# Altium PCB Isolated Gate Driver Bias Supply PCB.PcbDoc
Units mm, origin at the board's own origin, x right, y up, seen from the top; angles counter-clockwise.
Board outline 56.7 x 29.2 mm, 2 copper layers (Top Layer, Bottom Layer); 28 components, 23 nets, 89 pads, 0 vias.
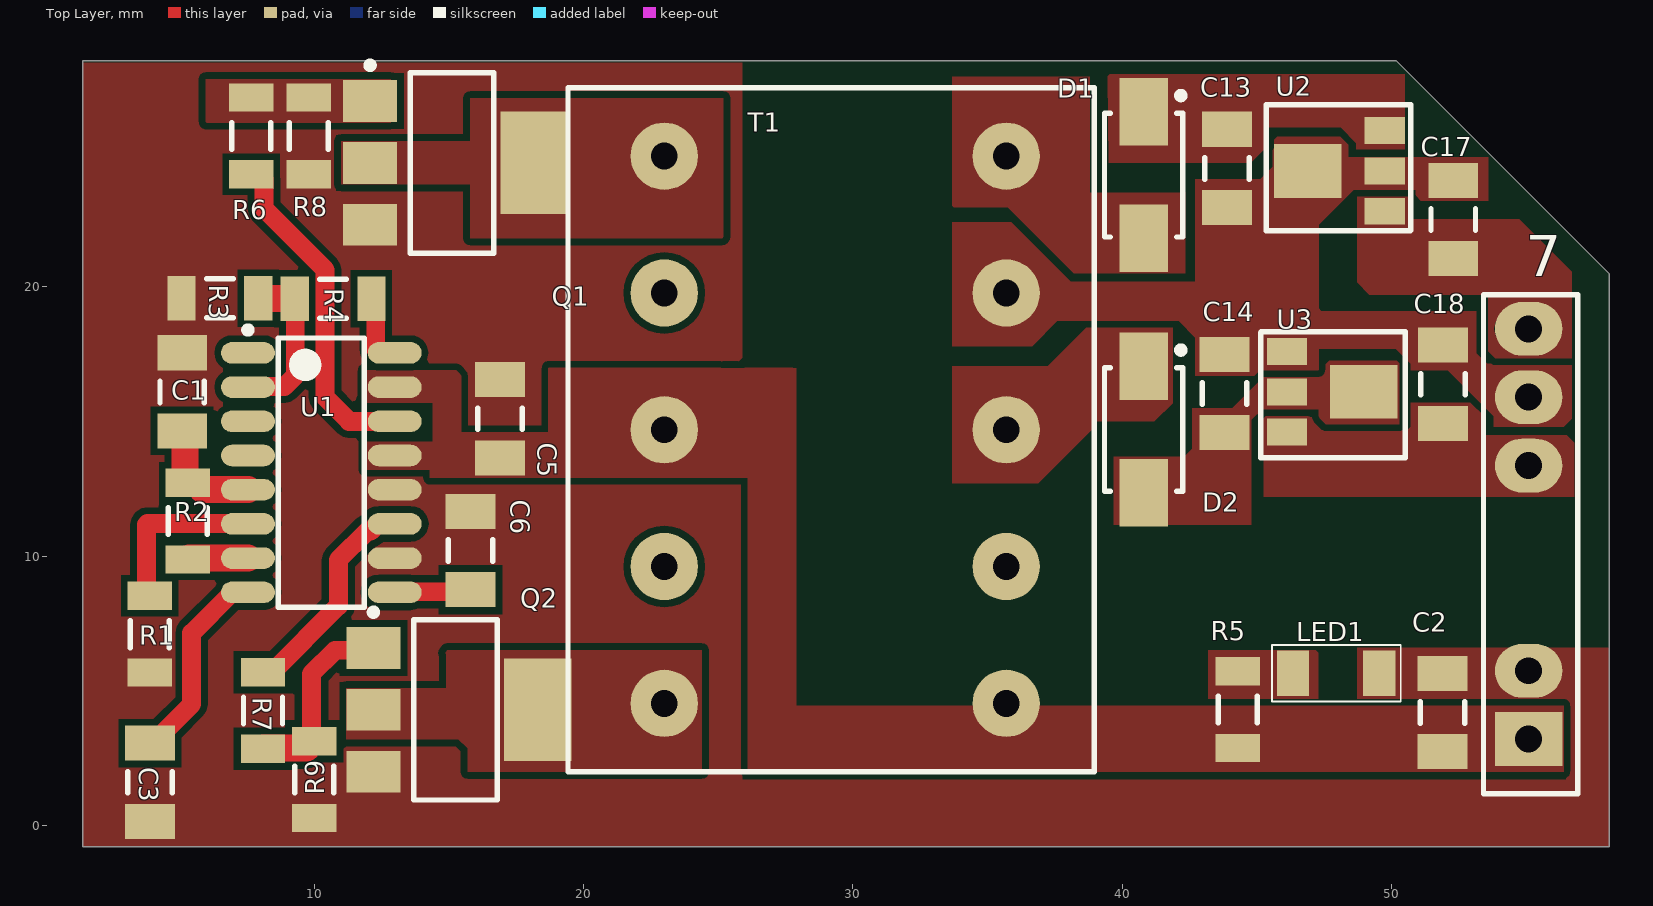
[diagram p0: Top Layer view]
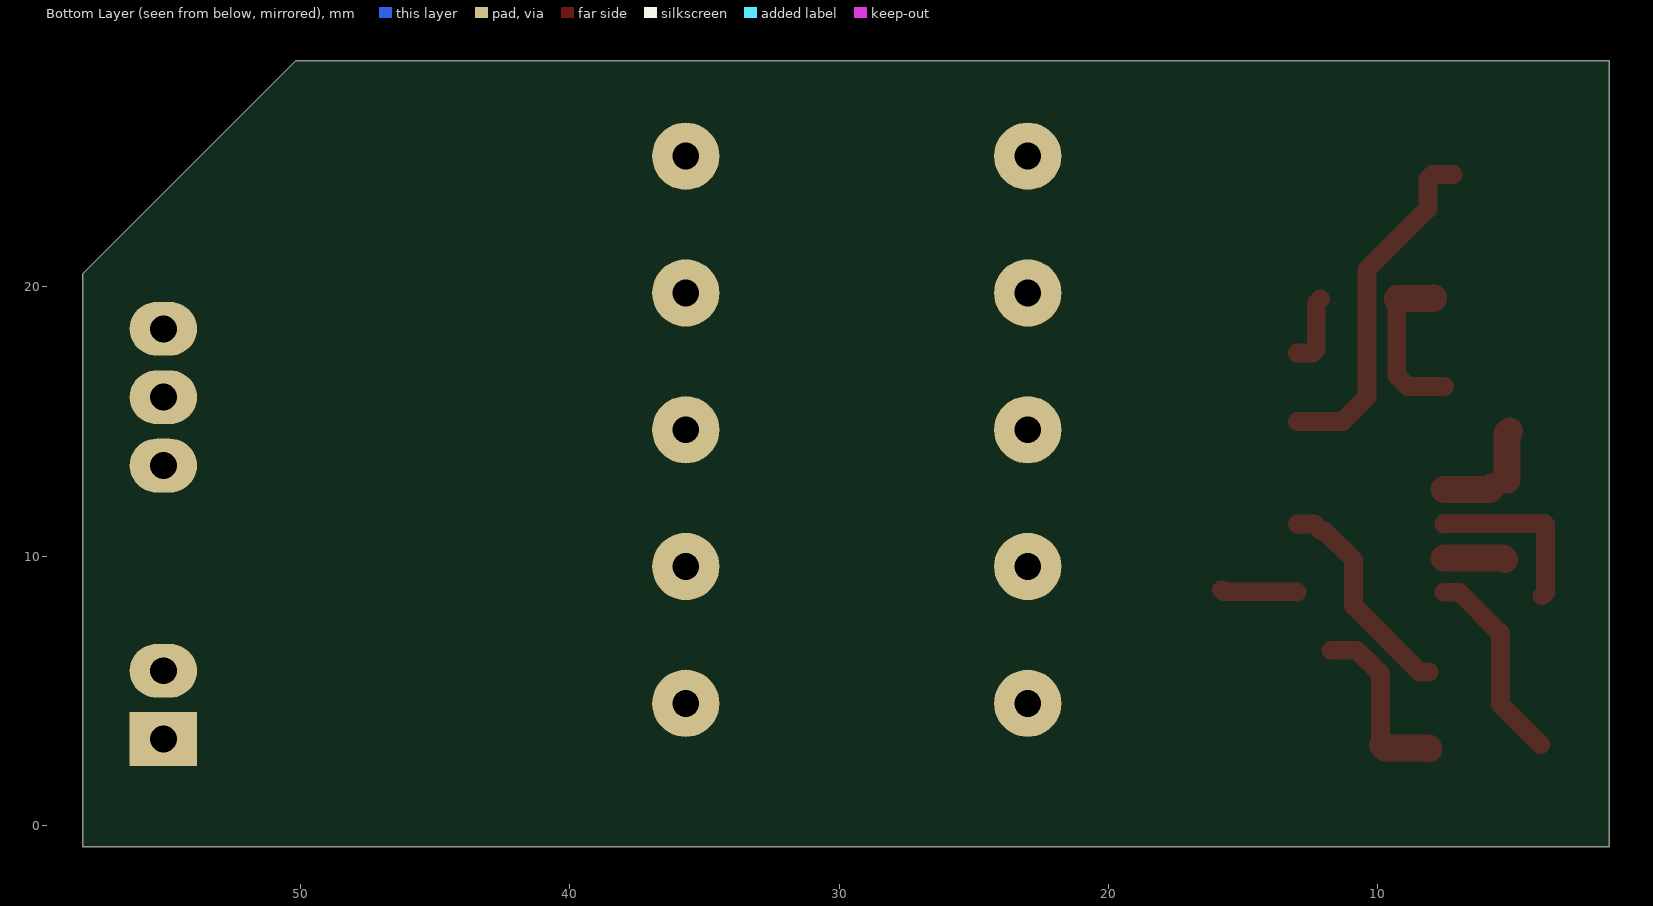
[diagram p1: Bottom Layer view, seen from below]
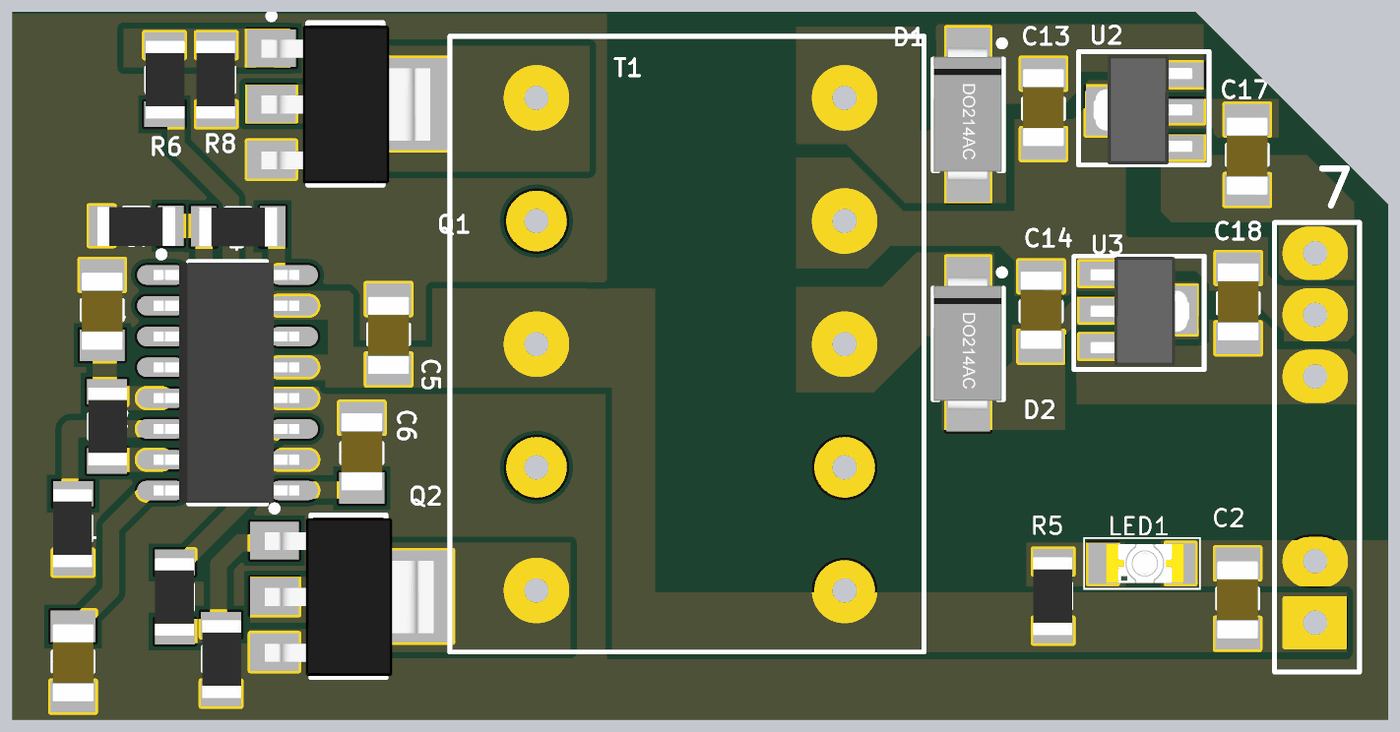
[diagram p2: 3D render of the assembled board from above, using the file's embedded part models]

## Layer stack, top to bottom
Top Solder: solder mask 0.0102, Solder Resist, Dk 3.5
Top Layer: signal copper 0.0356
Dielectric 1: dielectric 0.32, FR-4, Dk 4.8
Bottom Layer: signal copper 0.0356
Bottom Solder: solder mask 0.0102, Solder Resist, Dk 3.5

## Board outline
1.4,-0.8 1.4,28.4 50.171,28.4 58.1,20.47 58.1,-0.8

## Design rules (kind name [scope] priority, off if disabled: settings)
Clearance [All] p1: gap=0.254 ignorepadtopadclearanceinfootprint=FALSE except(0: Arc-Hole Track-Hole SMDPad-Hole THPad-Hole Via-Hole Fill-Hole Poly-Hole Region-Hole Text-Hole)
PlaneConnect [All] p1: planeconnectstyle=Direct reliefexpansion=0.508 reliefentries=4 reliefconductorwidth=0.254 reliefairgap=0.254
PolygonConnect [All] p1: connectstyle=Direct reliefconductorwidth=0.254 reliefentries=4 polygonreliefangle="90 Angle" airgapwidth=0.254
RoutingVias [All] p1: holewidth=0.711 width=1.27 viastyle="Through Hole" minholewidth=0.711 minwidth=1.27 maxholewidth=0.711 maxwidth=1.27
SolderMaskExpansion [All] p1: expansion=0.102 istentingtop=FALSE
Width [All] p1: maxlimit=1 minlimit=0.7 preferedwidth=0.7 minimp=50.000000 maximp=50.000000 favimp=50.000000
29 further rules are at their usual default settings.

## Components (designator, comment, footprint, x,y, rotation, side; value= is the part's Value field where it differs from the comment)
7 "7" SIP7 55.1,3.2 r180 top
C1 "5.6nF" Cap1206 5.1,16.1 r90 top
C2 "CL31A106KBHNNNE" Cap1206 51.9,4.195 r90 top
C3 "4.7unF" Cap1206 3.9,1.6 r90 top
C5 "CL31A106KBHNNNE" Cap1206 16.9,15.1 r90 top
C6 "10nF" Cap1206 15.8,10.2 r270 top
C13 "CL31A106KBHNNNE" Cap1206 43.9,24.4 r270 top
C14 "CL31A106KBHNNNE" Cap1206 43.8,16.04 r270 top
C17 "CL31A106KBHNNNE" Cap1206 52.3,22.5 r90 top
C18 "CL31A106KBHNNNE" Cap1206 51.925,16.381 r270 top
D1 "SS1200-LTP" DO-214AC 40.8,24.15 r270 top
D2 "SS1200-LTP" DO-214AC 40.8,14.7 r270 top
LED1 "LTST-C150KGKT" L-1206 47.95,5.645 r180 top
Q1 "IRFL110TRPBF" SOT223 15.125,24.6 r0 top
Q2 "IRFL110TRPBF" SOT223 15.25,4.29 r0 top
R1 "2.2k" RES1206 3.9,7.1 r90 top
R2 "10" RES1206 5.3,11.3 r270 top
R3 "10K" RES1206 6.5,19.575 r180 top
R4 "10K" RES1206 10.7,19.55 r180 top
R5 "10K" RES1206 44.3,4.3 r90 top
R6 "10" RES1206 7.665,25.6 r270 top
R7 "10" RES1206 8.1,4.265 r90 top
R8 "10K" RES1206 9.8,25.6 r90 top
R9 "10K" RES1206 10,1.7 r270 top
T1 "EE2006Transformer" EE2006 23,24.85 r0 top
U1 "SG3525AP013TR" "SOIC16N SG3525" 10.265,13.1 r0 top
U2 "L78M15CDT" sot89 49.575,22.805 r180 top
U3 "MC79M05CDTRKG" sot89 46.3,17.6 r0 top

## Footprints (in the part's own frame and the unit in brackets; to place one, negate y for a bottom-side part, rotate by r counter-clockwise, add the part's x,y. Pads: shape width x height; smd on the part's side, far side on the other; paste and mask are expansions set on the pad)
Cap1206 [mm]
  rect 1.3x1.85 smd: 1(-1.45,0) 2(1.45,0)
  silkscreen extent -0.4,-0.83 0.4,0.82, body extent -1.65,-0.85 1.55,0.85, height 1.75
DO-214AC [mm]
  rect 2.5x1.8 smd: a(2.35,0) k(-2.35,0)
  silkscreen extent -3.07,-1.45 2.3,1.51, body extent -2.77,-1.42 2.72,1.37, height 2.3
EE2006 [mm]
  round 2.5 hole 1: 1(0,0) 2(0,-5.08) 3(0,-10.16) 4(0,-15.24) 5(0,-20.32) 6(12.7,-20.32) 7(12.7,-15.24) 8(12.7,-10.16) 9(12.7,-5.08) 10(12.7,0)
  silkscreen extent -3.57,-22.86 15.98,2.54
L-1206 [mm]
  rect 1.2x1.7 smd: 1(-1.6,0) 2(1.6,0)
  silkscreen extent -2.4,-1.05 2.37,1.05, body extent -1.73,-0.8 1.48,0.8, height 1.11
RES1206 [mm] "Chip Resistor, 2-Leads, Body 3,15x1,58mm, IPC Medium Density"
  rect 1.05x1.65 smd: 1(-1.425,0) 2(1.425,0)
  silkscreen extent -0.5,-0.73 0.5,0.72, body extent -1.6,-0.78 1.6,0.83, height 0.61
SIP7 [mm]
  rect 2.5x2 hole 1: 1(0,0)
  oval 2.5x2 hole 1: 2(0,-2.54) 5(0,-10.16) 6(0,-12.7) 7(0,-15.24)
  silkscreen extent -1.82,-16.51 1.68,2.03
"SOIC16N SG3525" [mm] "SOIC, 16-Leads, Body 9,90x3,90mm, Pitch 1,27mm, IPC Medium Density"
  oval 2x0.8 smd: 1(-2.725,4.445) 2(-2.725,3.175) 3(-2.725,1.905) 4(-2.725,0.635) 5(-2.725,-0.635) 6(-2.725,-1.905) 7(-2.725,-3.175) 8(-2.725,-4.445) 9(2.725,-4.445) 10(2.725,-3.175) 11(2.725,-1.905) 12(2.725,-0.635) 13(2.725,0.635) 14(2.725,1.905) 15(2.725,3.175) 16(2.725,4.445)
  silkscreen extent -2.85,-5 1.6,5.42, body extent -3.05,-4.95 2.95,4.95, height 1.26
sot89 [mm]
  rect 1.5x1 smd: 1(-0.175,0) 2(-0.175,-1.5) 3(-0.175,-3)
  rect 2.5x2 smd: 2(2.675,-1.5)
  silkscreen extent -1.15,-3.95 4.23,0.72, body extent -0.47,-3.8 3.62,0.7, height 1.51
SOT223 [mm] "SOT223, 4-Leads, Body 6.50x7.00mm (avg), Pitch 2.30mm, IPC Medium Density"
  rect 2x1.55 smd: 1(-3.05,2.3) 2(-3.05,0) 3(-3.05,-2.3)
  rect 2.5x3.8 smd: 4(3.05,0)
  silkscreen extent -3.17,-3.35 1.55,3.75, body extent -3.45,-6.7 3.51,3.23, height 1.61

## Part data
7: library part sip7
C1 C3 C6: library part CL31A106KBHNNNE, "Cap Ceramic 10uF 50V X5R 10% SMD 1206 85C T/R", Capacitance=10uF, Case/Package=1206, Case Code (Metric)=3216, Dielectric=X5R, Manufacturer=Samsung, Max Operating Temperature=85°C, Min Operating Temperature=-55°C, Package Quantity=1, Supplier Part Number 1=1276-2876-2-ND, Tolerance=10%, Voltage Rating=50V, Case Code (Imperial)=1206, ComponentLink1Description=https://media.digikey.com/pdf/Data%20Sheets/Samsung%20PDFs/CL_Series_MLCC_ds.pdf?src-supplier=Digi-Key, ComponentLink1URL=https://media.digikey.com/pdf/Data%20Sheets/Samsung%20PDFs/CL_Series_MLCC_ds.pdf?src-supplier=Digi-Key, ComponentLink2Description=http://www1.futureelectronics.com/doc/SAMSUNG%20PASSIVE/CL05B104KQ5NNNC.pdf?src-supplier=Future+Electronics, ComponentLink2URL=http://www1.futureelectronics.com/doc/SAMSUNG%20PASSIVE/CL05B104KQ5NNNC.pdf?src-supplier=Future+Electronics, ComponentLink3Description=http://www.rapidonline.com/pdf/71-0881.pdf?src-supplier=Rapid+Electronics, ComponentLink3URL=http://www.rapidonline.com/pdf/71-0881.pdf?src-supplier=Rapid+Electronics, ComponentLink4Description=https://www.verical.com/server-webapp/html/getDatasheet?partID=353196&src-supplier=Verical, ComponentLink4URL=https://www.verical.com/server-webapp/html/getDatasheet?partID=353196&src-supplier=Verical, ComponentLink5Description=https://produktinfo.conrad.com/datenblaetter/450000-474999/452492-da-01-en-VS_KONDENSATOR_1206.pdf?src-supplier=Conrad, ComponentLink5URL=https://produktinfo.conrad.com/datenblaetter/450000-474999/452492-da-01-en-VS_KONDENSATOR_1206.pdf?src-supplier=Conrad, Contact Plating=Tin, Depth=1.6mm, Height=1.6mm, Lead Free="Lead Free", Length=3.2mm, Manufacturer Part Number=CL31A106KBHNNNE, Material=Ceramic, Mount="Surface Mount", Packaging="Tape and Reel", Pricing 1="2000 = 0,17875, 4000 = 0,16758 (USD)", Radiation Hardening=No, RoHS=Yes, Stock 1=482000, Supplier 1=Digi-Key, Thickness=0.071inch, Voltage Rating (DC)=50V, Width=0.063inch
C2 C5 C13 C14 C17 C18: "Cap Ceramic 10uF 50V X5R 10% SMD 1206 85C T/R", Capacitance=10uF, Case/Package=1206, Case Code (Metric)=3216, Dielectric=X5R, Manufacturer=Samsung, Max Operating Temperature=85°C, Min Operating Temperature=-55°C, Package Quantity=1, Supplier Part Number 1=1276-2876-2-ND, Tolerance=10%, Voltage Rating=50V, Case Code (Imperial)=1206, ComponentLink1Description=https://media.digikey.com/pdf/Data%20Sheets/Samsung%20PDFs/CL_Series_MLCC_ds.pdf?src-supplier=Digi-Key, ComponentLink1URL=https://media.digikey.com/pdf/Data%20Sheets/Samsung%20PDFs/CL_Series_MLCC_ds.pdf?src-supplier=Digi-Key, ComponentLink2Description=http://www1.futureelectronics.com/doc/SAMSUNG%20PASSIVE/CL05B104KQ5NNNC.pdf?src-supplier=Future+Electronics, ComponentLink2URL=http://www1.futureelectronics.com/doc/SAMSUNG%20PASSIVE/CL05B104KQ5NNNC.pdf?src-supplier=Future+Electronics, ComponentLink3Description=http://www.rapidonline.com/pdf/71-0881.pdf?src-supplier=Rapid+Electronics, ComponentLink3URL=http://www.rapidonline.com/pdf/71-0881.pdf?src-supplier=Rapid+Electronics, ComponentLink4Description=https://www.verical.com/server-webapp/html/getDatasheet?partID=353196&src-supplier=Verical, ComponentLink4URL=https://www.verical.com/server-webapp/html/getDatasheet?partID=353196&src-supplier=Verical, ComponentLink5Description=https://produktinfo.conrad.com/datenblaetter/450000-474999/452492-da-01-en-VS_KONDENSATOR_1206.pdf?src-supplier=Conrad, ComponentLink5URL=https://produktinfo.conrad.com/datenblaetter/450000-474999/452492-da-01-en-VS_KONDENSATOR_1206.pdf?src-supplier=Conrad, Contact Plating=Tin, Depth=1.6mm, Height=1.6mm, Lead Free="Lead Free", Length=3.2mm, Manufacturer Part Number=CL31A106KBHNNNE, Material=Ceramic, Mount="Surface Mount", Packaging="Tape and Reel", Pricing 1="2000 = 0,17875, 4000 = 0,16758 (USD)", Radiation Hardening=No, RoHS=Yes, Stock 1=482000, Supplier 1=Digi-Key, Thickness=0.071inch, Voltage Rating (DC)=50V, Width=0.063inch
D1 D2: "DIODE SCHOTTKY 200V 1A DO214AC", Average Rectified Current=1A, Forward Voltage=920mV, Manufacturer=MCC, Max Forward Surge Current (Ifsm)=30A, Max Operating Temperature=150°C, Max Repetitive Reverse Voltage (Vrrm)=200V, Max Reverse Leakage Current=1mA, Min Operating Temperature=-55°C, Package Quantity=1, Supplier Part Number 1=SS1200-LTPMSTR-ND, ComponentLink1Description=https://datasheet.ciiva.com/913/ss1150-l-ss1200-ldo-214ac-913194.pdf?src-supplier=Digi-Key, ComponentLink1URL=https://datasheet.ciiva.com/913/ss1150-l-ss1200-ldo-214ac-913194.pdf?src-supplier=Digi-Key, ComponentLink2Description=https://datasheet.ciiva.com/15404/ss1150-l-ss1200-ldo-214ac-272760-15404740.pdf?src-supplier=Mouser, ComponentLink2URL=https://datasheet.ciiva.com/15404/ss1150-l-ss1200-ldo-214ac-272760-15404740.pdf?src-supplier=Mouser, ComponentLink3Description=https://datasheet.ciiva.com/913/ss1150-l-ss1200-ldo-214ac-913195.pdf?src-supplier=Digi-Key, ComponentLink3URL=https://datasheet.ciiva.com/913/ss1150-l-ss1200-ldo-214ac-913195.pdf?src-supplier=Digi-Key, ComponentLink4Description=https://datasheet.ciiva.com/913/ss1150-l-ss1200-ldo-214ac-913196.pdf?src-supplier=Digi-Key, ComponentLink4URL=https://datasheet.ciiva.com/913/ss1150-l-ss1200-ldo-214ac-913196.pdf?src-supplier=Digi-Key, ComponentLink5Description=https://datasheet.ciiva.com/17447/ss1150-l-ss1200-ldo-214ac-17447695.pdf?src-supplier=Future+Electronics, ComponentLink5URL=https://datasheet.ciiva.com/17447/ss1150-l-ss1200-ldo-214ac-17447695.pdf?src-supplier=Future+Electronics, Element Configuration=Single, Forward Current=1A, Lead Free="Lead Free", Manufacturer Part Number=SS1200-LTP, Max Reverse Voltage (DC)=200V, Max Surge Current=30A, Mount="Surface Mount", Packaging="Tape and Reel", Peak Reverse Current=1mA, Pricing 1="5000 = 0,09300, 10000 = 0,08700, 25000 = 0,08400 (USD)", RoHS=Yes, Stock 1=10000, Supplier 1=Digi-Key
LED1: "LED", Manufacturer_Name=Lite-On, Mouser Part Number=859-LTST-C150KGKT, RS Part Number=6920871, Datasheet Link=http://optoelectronics.liteon.com/upload/download/ds22-2000-072/ltst-c150kgkt.pdf, Height=1.2mm, Manufacturer_Part_Number=LTST-C150KGKT, Mouser Price/Stock=https://www.mouser.com/Search/Refine.aspx?Keyword=859-LTST-C150KGKT, RS Price/Stock=https://uk.rs-online.com/web/p/products/6920871
Q1 Q2: "Trans MOSFET N-CH 100V 1.5A 4-Pin(3+Tab) T/R", Case/Package=SOT-223, Continuous Drain Current (ID)=1.5A, Current=15A, Drain to Source Breakdown Voltage=100V, Drain to Source Resistance=540mR, Gate to Source Voltage (Vgs)=20V, Input Capacitance=180pF, Manufacturer=Vishay, Max Operating Temperature=150°C, Max Power Dissipation=2W, Min Operating Temperature=-55°C, Package Quantity=1, Supplier Part Number 1=IRFL110PBFTR-ND, ComponentLink1Description=http://www.vishay.com/docs/91192/sihfl110.pdf?src-supplier=Avnet, ComponentLink1URL=http://www.vishay.com/docs/91192/sihfl110.pdf?src-supplier=Avnet, ComponentLink2Description=http://www.vishay.com/docs/91192/sihfl110.pdf?src-supplier=Future+Electronics, ComponentLink2URL=http://www.vishay.com/docs/91192/sihfl110.pdf?src-supplier=Future+Electronics, ComponentLink3Description=http://www.vishay.com/docs/91192/sihfl110.pdf?src-supplier=Avnet+Europe, ComponentLink3URL=http://www.vishay.com/docs/91192/sihfl110.pdf?src-supplier=Avnet+Europe, ComponentLink4Description=https://www.verical.com/server-webapp/html/getDatasheet?partID=80948&src-supplier=Verical, ComponentLink4URL=https://www.verical.com/server-webapp/html/getDatasheet?partID=80948&src-supplier=Verical, ComponentLink5Description=http://www.vishay.com/docs/91192/sihfl110.pdf?src-supplier=Digi-Key, ComponentLink5URL=http://www.vishay.com/docs/91192/sihfl110.pdf?src-supplier=Digi-Key, ComponentLink6Description=http://uk.rs-online.com/webdocs/126c/0900766b8126cec6.pdf?src-supplier=RSComponents, ComponentLink6URL=http://uk.rs-online.com/webdocs/126c/0900766b8126cec6.pdf?src-supplier=RSComponents, ComponentLink7Description=http://www.jameco.com/Jameco/Products/ProdDS/1562152.pdf?src-supplier=Jameco, ComponentLink7URL=http://www.jameco.com/Jameco/Products/ProdDS/1562152.pdf?src-supplier=Jameco, ComponentLink8Description=http://datasheet.iiic.cc/vishay_[siliconix]/IRFL110TRPBF.pdf?src-supplier=IIIC, ComponentLink8URL=http://datasheet.iiic.cc/vishay_[siliconix]/IRFL110TRPBF.pdf?src-supplier=IIIC, Contact Plating=Matte,Tin, Drain to Source Voltage (Vdss)=100V, Element Configuration=Single, Fall Time=9.4ns, Height=1.8mm, Lead Free="Lead Free", Length=6.7mm, Manufacturer Part Number=IRFL110TRPBF, Mount="Surface Mount", Number of Channels=1, Number of Elements=1, Number of Pins=3, On-State Resistance=540mR, Packaging="Tape and Reel", Power Dissipation=2W, Pricing 1="2500 = 0,29779 (USD)", Radiation Hardening=No, Rds On Max=540mR, REACH SVHC=Unknown, Rise Time=16ns, RoHS=Yes, Stock 1=5000, Supplier 1=Digi-Key, Turn-Off Delay Time=15ns, Turn-On Delay Time=6.9ns, Voltage=100V, Weight=0.008826oz, Width=3.7mm
R1 R2 R3 R4 R5 R6 R7 R8 R9: library part RMCF1206ZT0R00, "RES 0 OHM JUMPER 1/4W 1206", Case/Package=1206, Case Code (Metric)=3216, Current Rating=2A, Manufacturer="Stackpole Electronics", Max Operating Temperature=155°C, Max Power Dissipation=250mW, Min Operating Temperature=-55°C, Resistance=0mR, Supplier Part Number 1=RMCF1206ZT0R00TR-ND, Working Voltage=200V, Case Code (Imperial)=1206, Composition="Thick Film", Contact Plating=Matte,Tin, Depth=1.6mm, Features="Automotive AEC-Q200", Height=0.028inch, Lead Free="Lead Free", Length=0.126inch, Manufacturer Part Number=RMCF1206ZT0R00, Military Standard=Not, Mount="Surface Mount", Number of Terminations=2, Packaging="Tape and Reel", Power Rating=250mW, Pricing 1="5000 = 0,00355, 10000 = 0,00309, 25000 = 0,00271, 50000 = 0,00249, 125000 = 0,00244 (USD)", Radiation Hardening=No, RoHS=Yes, Stock 1=1700000, Supplier 1=Digi-Key, Width=0.063inch
U1: "IC REG CTRLR BCK/PSH-PULL 16SOIC", Case/Package=SOIC, Manufacturer=STMicroelectronics, Max Frequency=500kHz, Max Operating Temperature=70°C, Max Supply Current=20mA, Max Supply Voltage=35V, Min Operating Temperature=0°C, Operating Supply Current=14mA, Output Current=400A, Output Voltage=5.2V, Package Quantity=1, Supplier Part Number 1=497-6479-1-ND, Switching Frequency=400kHz, ComponentLink1Description=http://www.st.com/content/ccc/resource/technical/document/datasheet/c0/12/98/4a/3b/1a/4b/8b/CD00000958.pdf/files/CD00000958.pdf/jcr:content/translations/en.CD00000958.pdf?src-supplier=Digi-Key, ComponentLink1URL=http://www.st.com/content/ccc/resource/technical/document/datasheet/c0/12/98/4a/3b/1a/4b/8b/CD00000958.pdf/files/CD00000958.pdf/jcr:content/translations/en.CD00000958.pdf?src-supplier=Digi-Key, ComponentLink2Description=https://www.verical.com/server-webapp/html/getDatasheet?partID=376579&src-supplier=Verical, ComponentLink2URL=https://www.verical.com/server-webapp/html/getDatasheet?partID=376579&src-supplier=Verical, ComponentLink3Description=http://www.produktinfo.conrad.com/datenblaetter/1100000-1199999/001185611-da-01-en-IC_REG_CTRLR_P_SG3525AP013TR_SOIC_16_STM.pdf?src-supplier=Conrad, ComponentLink3URL=http://www.produktinfo.conrad.com/datenblaetter/1100000-1199999/001185611-da-01-en-IC_REG_CTRLR_P_SG3525AP013TR_SOIC_16_STM.pdf?src-supplier=Conrad, Duty Cycle=49%, Fall Time=50ns, Lead Free="Lead Free", Manufacturer Part Number=SG3525AP013TR, Max Duty Cycle=49%, Mount="Surface Mount", Number of Outputs=2, Number of Pins=16, Packaging="Tape and Reel", Pricing 1="1 = 1,58000, 10 = 1,41600, 100 = 1,10400, 500 = 0,91196, 1000 = 0,71997 (USD)", Radiation Hardening=No, Rise Time=100ns, RoHS=Yes, Stock 1=5712, Supplier 1=Digi-Key, Weight=0.007079oz
U2: "Linear Voltage Regulators 15V 0.5A Positive", Case/Package=DPAK, Dropout Voltage=2V, Manufacturer=STMicroelectronics, Max Input Voltage=35V, Max Operating Temperature=150°C, Max Output Current=500mA, Min Operating Temperature=0°C, Output Voltage=15V, Package Quantity=75, Quiescent Current=6mA, ComponentLink1Description=http://docs-usa.electrocomponents.com/techlib:/itc_doclist_US.htm?stockno=1890999&src-supplier=Allied+Electronics, ComponentLink1URL=http://docs-usa.electrocomponents.com/techlib:/itc_doclist_US.htm?stockno=1890999&src-supplier=Allied+Electronics, ComponentLink2Description=http://www.st.com/web/en/resource/technical/document/datasheet/CD00000447.pdf?src-supplier=Avnet+Europe, ComponentLink2URL=http://www.st.com/web/en/resource/technical/document/datasheet/CD00000447.pdf?src-supplier=Avnet+Europe, ComponentLink3Description=http://www.mouser.com/ds/2/389/stmicroelectronics_cd00000447-329548.pdf?src-supplier=Mouser, ComponentLink3URL=http://www.mouser.com/ds/2/389/stmicroelectronics_cd00000447-329548.pdf?src-supplier=Mouser, Height=2.4mm, Length=6.6mm, Manufacturer Part Number=L78M15CDT, Min Input Voltage=35V, Mount="Surface Mount", Number of Outputs=1, Number of Pins=3, Output Current=500mA, Output Type=Fixed, Packaging=Rail/Tube, Polarity=Positive, Radiation Hardening=No, RoHS=Yes, Supplier 1=Avnet, Supplier Part Number 1=L78M15CDT, Width=6.2mm
U3: "ON SEMICONDUCTOR - MC79M05CDTRKG - NEGATIVE VOLTAGE REGULATOR, -5V, DPAK-3", Case/Package=DPAK, Dropout Voltage=1.1V, Manufacturer="ON Semiconductor", Max Input Voltage=-35V, Max Operating Temperature=125°C, Max Output Current=500mA, Max Output Voltage=-5.2V, Min Input Voltage=-7V, Min Operating Temperature=0°C, Min Output Voltage=-5V, Output Voltage Accuracy=4%, Package Quantity=1, Power Supply Rejection Ratio (PSRR)=66dB, Supplier Part Number 1=MC79M05CDTRKGOSTR-ND, Accuracy=4%, ComponentLink1Description=http://www.farnell.com/datasheets/2236912.pdf?src-supplier=Newark, ComponentLink1URL=http://www.farnell.com/datasheets/2236912.pdf?src-supplier=Newark, ComponentLink2Description=http://www.onsemi.com/pub/Collateral/MC79M00-D.PDF?src-supplier=Digi-Key, ComponentLink2URL=http://www.onsemi.com/pub/Collateral/MC79M00-D.PDF?src-supplier=Digi-Key, ComponentLink3Description=http://www.farnell.com/datasheets/1747960.pdf?src-supplier=Element14, ComponentLink3URL=http://www.farnell.com/datasheets/1747960.pdf?src-supplier=Element14, ComponentLink4Description=http://www.onsemi.com/pub/Collateral/MC79M00-D.PDF?src-supplier=Avnet+Europe, ComponentLink4URL=http://www.onsemi.com/pub/Collateral/MC79M00-D.PDF?src-supplier=Avnet+Europe, Contact Plating=Matte,Tin, Halogen Free="Halogen Free", Height=2.38mm, Lead Free="Lead Free", Length=6.73mm, Manufacturer Part Number=MC79M05CDTRKG, Mount="Surface Mount", Nominal Output Voltage=-5V, Number of Outputs=1, Number of Pins=3, Number of Regulators=1, Output Current=500mA, Output Type=Fixed, Output Voltage=-5V, Packaging="Tape and Reel", Polarity=Negative, Pricing 1="2500 = 0,18538, 5000 = 0,17342, 12500 = 0,16146, 25000 = 0,15309, 62500 = 0,14950 (USD)", Radiation Hardening=No, REACH SVHC="No SVHC", RoHS=Yes, Stock 1=5000, Supplier 1=Digi-Key, Width=6.22mm

## Nets (pads, with @x,y where several pads share a name; then routed paths per layer and width w, separated by ;. In a path a pad name is that pad's centre, name@x,y a point inside that pad or via, vN(x,y) a via of type N, cw(c..) or ccw(c..) an arc to the next point about the centre after c; other vN are vias at no path point)
12v: 7.1 C2.1 C5.1 R5.1 T1.3 T1.6 U1.13 U1.15 | length 0.3
  Top Layer w1: T1.3@23,14.396 T1.3
+15v_1: 7.7 C17.1 U2.1 | length 0.7
  Top Layer w0.7: 7.7@54.448,18.44 7.7
-5v_1: 7.5 C18.2 U3.3
GND: 7.2 C1.2 C2.2 C3.1 C5.2 C6.1 LED1.1 Q1.3 Q2.3 R1.1 R3.2 R8.1 R9.2 U1.10 U1.12
Gnd1: 7.6 C13.2 C14.1 C17.2 C18.1 T1.9 U2.2 U3.1
NetC1_1: C1.1 R2.1 U1.5 | length 3.7
  Top Layer w1: C1.1 5.2,14.55 R2.1@5.2,12.825 ; R2.1@5.76,12.565 5.86,12.465 U1.5
NetC3_2: C3.2 U1.8 | length 7.5
  Top Layer w0.7: C3.2@3.95,3 5.45,4.5 5.45,7.138 6.967,8.655 U1.8
NetC6_2: C6.2 U1.9 | length 2.8
  Top Layer w0.7: U1.9 13.009,8.674 15.724,8.674 C6.2
NetC13_1: C13.1 D1.k U2.3
NetC14_2: C14.2 D2.a U3.2
NetD1_a: D1.a T1.10
NetD2_k: D2.k T1.8
NetLED1_2: LED1.2 R5.2
NetQ1_1: Q1.1 R6.1 R8.2
NetQ1_2: Q1.2 Q1.4 T1.1 | length 0.4
  Top Layer w0.7: T1.1@22.75,24.6 T1.1
NetQ2_1: Q2.1 R7.1 R9.1 | length 6.7
  Top Layer w0.7: R9.1@9.827,2.982 9.9,3.055 9.9,5.624 10.776,6.5 Q2.1@11.75,6.5
  Top Layer w1: R7.1 8.125,2.865 9.71,2.865 R9.1@9.827,2.982
NetQ2_2: Q2.2 Q2.4 T1.5 | length 0.5
  Top Layer w0.7: T1.5@22.67,4.2 T1.5
NetR1_2: R1.2 U1.6 | length 6.5
  Top Layer w0.7: R1.2 3.771,8.654 3.771,11.165 3.81,11.204 7.531,11.204 U1.6
NetR2_2: R2.2 U1.7 | length 2.3
  Top Layer w1: R2.2 5.35,9.925 U1.7
NetR3_1: R3.1 R4.2 U1.2 | length 6.2
  Top Layer w0.7: U1.2@7.521,16.294 U1.2 7.559,16.294 8.89,16.294 9.3,16.704 9.3,19.525 R4.2
  Top Layer w1: R3.1 7.938,19.563 9.262,19.563 R4.2
NetR4_1: R4.1 U1.16 | length 2.7
  Top Layer w0.7: R4.1 12.287,19.389 12.287,17.675 12.417,17.545 U1.16
NetR6_2: R6.2 U1.14 | length 13.2
  Top Layer w0.7: R6.2@7.2,24.175 R6.2@7.509,24.175 ; R6.2@7.4,24.175 R6.2@7.7,24.175 ; R6.2 7.7,24.175 7.965,24.175 8.14,24 8.14,22.889 10.404,20.626 10.404,15.896 11.3,15 12.985,15 U1.14
NetR7_2: R7.2 U1.11 | length 8.2
  Top Layer w0.7: R7.2 8.44,5.69 10.9,8.15 10.9,9.855 11.974,10.929 12.097,10.929 12.363,11.195 U1.11 U1.11@12.971,11.176
pads on no net: T1.2 T1.4 T1.7 U1.1 U1.3 U1.4

## Polygon pours and split planes (outlines as drawn)
NetLED1_2 on Top Layer "Top Layer-NetLED1_2" (solid, remove dead copper, pour order 54): 43.2,6.498 47.287,6.502 47.287,4.635 47.222,4.635 43.2,4.635
12v on Top Layer "Top Layer-12v" (solid, remove dead copper, pour order 50): 26.1,12.9 20.5,12.9 20.5,16.98 27.9,16.98 27.9,4.45 56.4,4.45 56.4,1.99 26.1,1.99
NetQ1_1 on Top Layer "Top Layer-NetQ1_1" (solid, remove dead copper, pour order 46): 5.98,27.7 12.85,27.7 12.85,26.1 5.98,26.1
NetQ2_2 on Top Layer "Top Layer-NetQ2_2" (solid, remove dead copper, pour order 44): 11.2,5.1 14.9,5.1 14.9,6.368 14.85,6.418 14.932,6.5 24.4,6.5 24.4,1.99 15.7,1.99 15.7,2.856 15.356,3.2 11.2,3.2
12v on Top Layer "Top Layer-12v 1" (solid, remove dead copper, pour order 42): 14.4,14.59 14.4,15.7 11.895,15.7 11.8,15.795 11.865,15.86 11.865,16.9 15.275,16.9 15.456,16.719 15.456,14.59 18.7,14.59 18.7,17 27.88,17 27.9,16.98 27.9,12.9 14.3,12.9 14.3,13.2 11.9,13.2 11.9,14.25 14.4,14.25
NetQ1_2 on Top Layer "Top Layer-NetQ1_2" (solid, remove dead copper, pour order 40): 11,25.4 15.8,25.4 15.8,27 25.2,27 25.2,21.85 25.15,21.8 15.8,21.8 15.8,23.8 11,23.8
-5v_1 on Top Layer "Top Layer--5v_1" (solid, remove dead copper, pour order 38): 45.241,15.255 47,15.255 47.574,14.681 50.61,14.681 50.725,14.796 50.725,15.7 52.944,15.7 53.425,15.219 53.425,14.49 56.51,14.49 56.8,14.2 56.8,12.2 45.257,12.2
NetC14_2 on Top Layer "Top Layer-NetC14_2" (solid, remove dead copper, pour order 36): 39.7,13.69 42.31,13.69 42.6,13.98 42.6,15.484 44.084,15.484 45.337,16.736 47.5,16.736 47.5,17.055 47.7,17.255 50.2,17.255 50.3,17.155 50.3,14.886 47.569,14.886 47.3,15.155 47.3,15.455 45.2,15.455 44.8,15.055 44.8,11.155 39.7,11.155
+15v_1 on Top Layer "Top Layer-+15v_1" (solid, remove dead copper, pour order 34): 48.734,23.5 50.7,23.5 50.725,23.475 50.725,22.5 54.759,22.5 56.7,20.559 56.7,17.35 53.858,17.35 53.6,17.608 53.6,19.71 49.19,19.71 48.734,20.166
NetD2_k on Top Layer "Top Layer-NetD2_k" (solid, remove dead copper, pour order 32): 33.7,17.05 37.242,17.05 38.692,18.5 41.875,18.5 41.875,15.675 41.205,15.005 38.9,15.005 38.9,14.704 36.896,12.7 33.7,12.7
Gnd1 on Top Layer "Top Layer-Gnd1" (solid, remove dead copper, pour order 30): 47.3,19.2 47.4,19.1 53.161,19.1 53.161,17.539 53.557,17.143 56.7,17.143 56.7,15.1 56.4,14.8 53.8,14.8 53.8,15.2 52.1,16.9 50.725,16.9 50.725,17.143 50.168,17.7 47.3,17.7 47.3,16.9 45.119,16.9 44.919,16.7 42.715,16.7 42.715,18.116 42.098,18.733 37.6,18.733 36.669,17.8 33.7,17.8 33.7,22.4 35.884,22.4 38.1,20.184 42.715,20.184 42.715,23.984 45.134,23.984 45.6,24.45 45.6,25.572 48.128,25.572 48.4,25.3 48.4,24.812 53.6,24.812 53.6,23.2 51.1,23.2 50.9,23.4 50.9,23.6 48.6,23.6 47.3,22.3
NetD1_a on Top Layer "Top Layer-NetD1_a" (solid, remove dead copper, pour order 28): 33.7,27.8 38.8,27.8 38.8,23.5 42.353,23.5 42.353,20.5 38.2,20.5 35.75,22.95 33.75,22.95 33.7,23
NetC13_1 on Top Layer "Top Layer-NetC13_1" (solid, remove dead copper, pour order 26): 39.462,27.9 50.5,27.9 50.5,25.1 48.7,25.1 48.7,25.336 48.118,25.918 45.4,25.918 45.4,25.225 44.775,24.6 39.5,24.6
GND on Top Layer "Top Layer-GND" (solid, remove dead copper, pour order 20): 25.9,1.7 56.5,1.7 56.5,4.6 48.734,4.6 48.734,6.6 58.1,6.6 58.1,-0.8 1.4,-0.8 1.4,28.328 25.9,28.328
no net on Top Layer "Top Layer-No Net" (solid, pour order 14): 100.219,37.624

## Silkscreen, mask and mechanical layers (free items; w line width, h text height)
Mechanical 1:
  the board outline again, w0.254